# Allegro board COMPLETE SCHEMATIC V6.brd
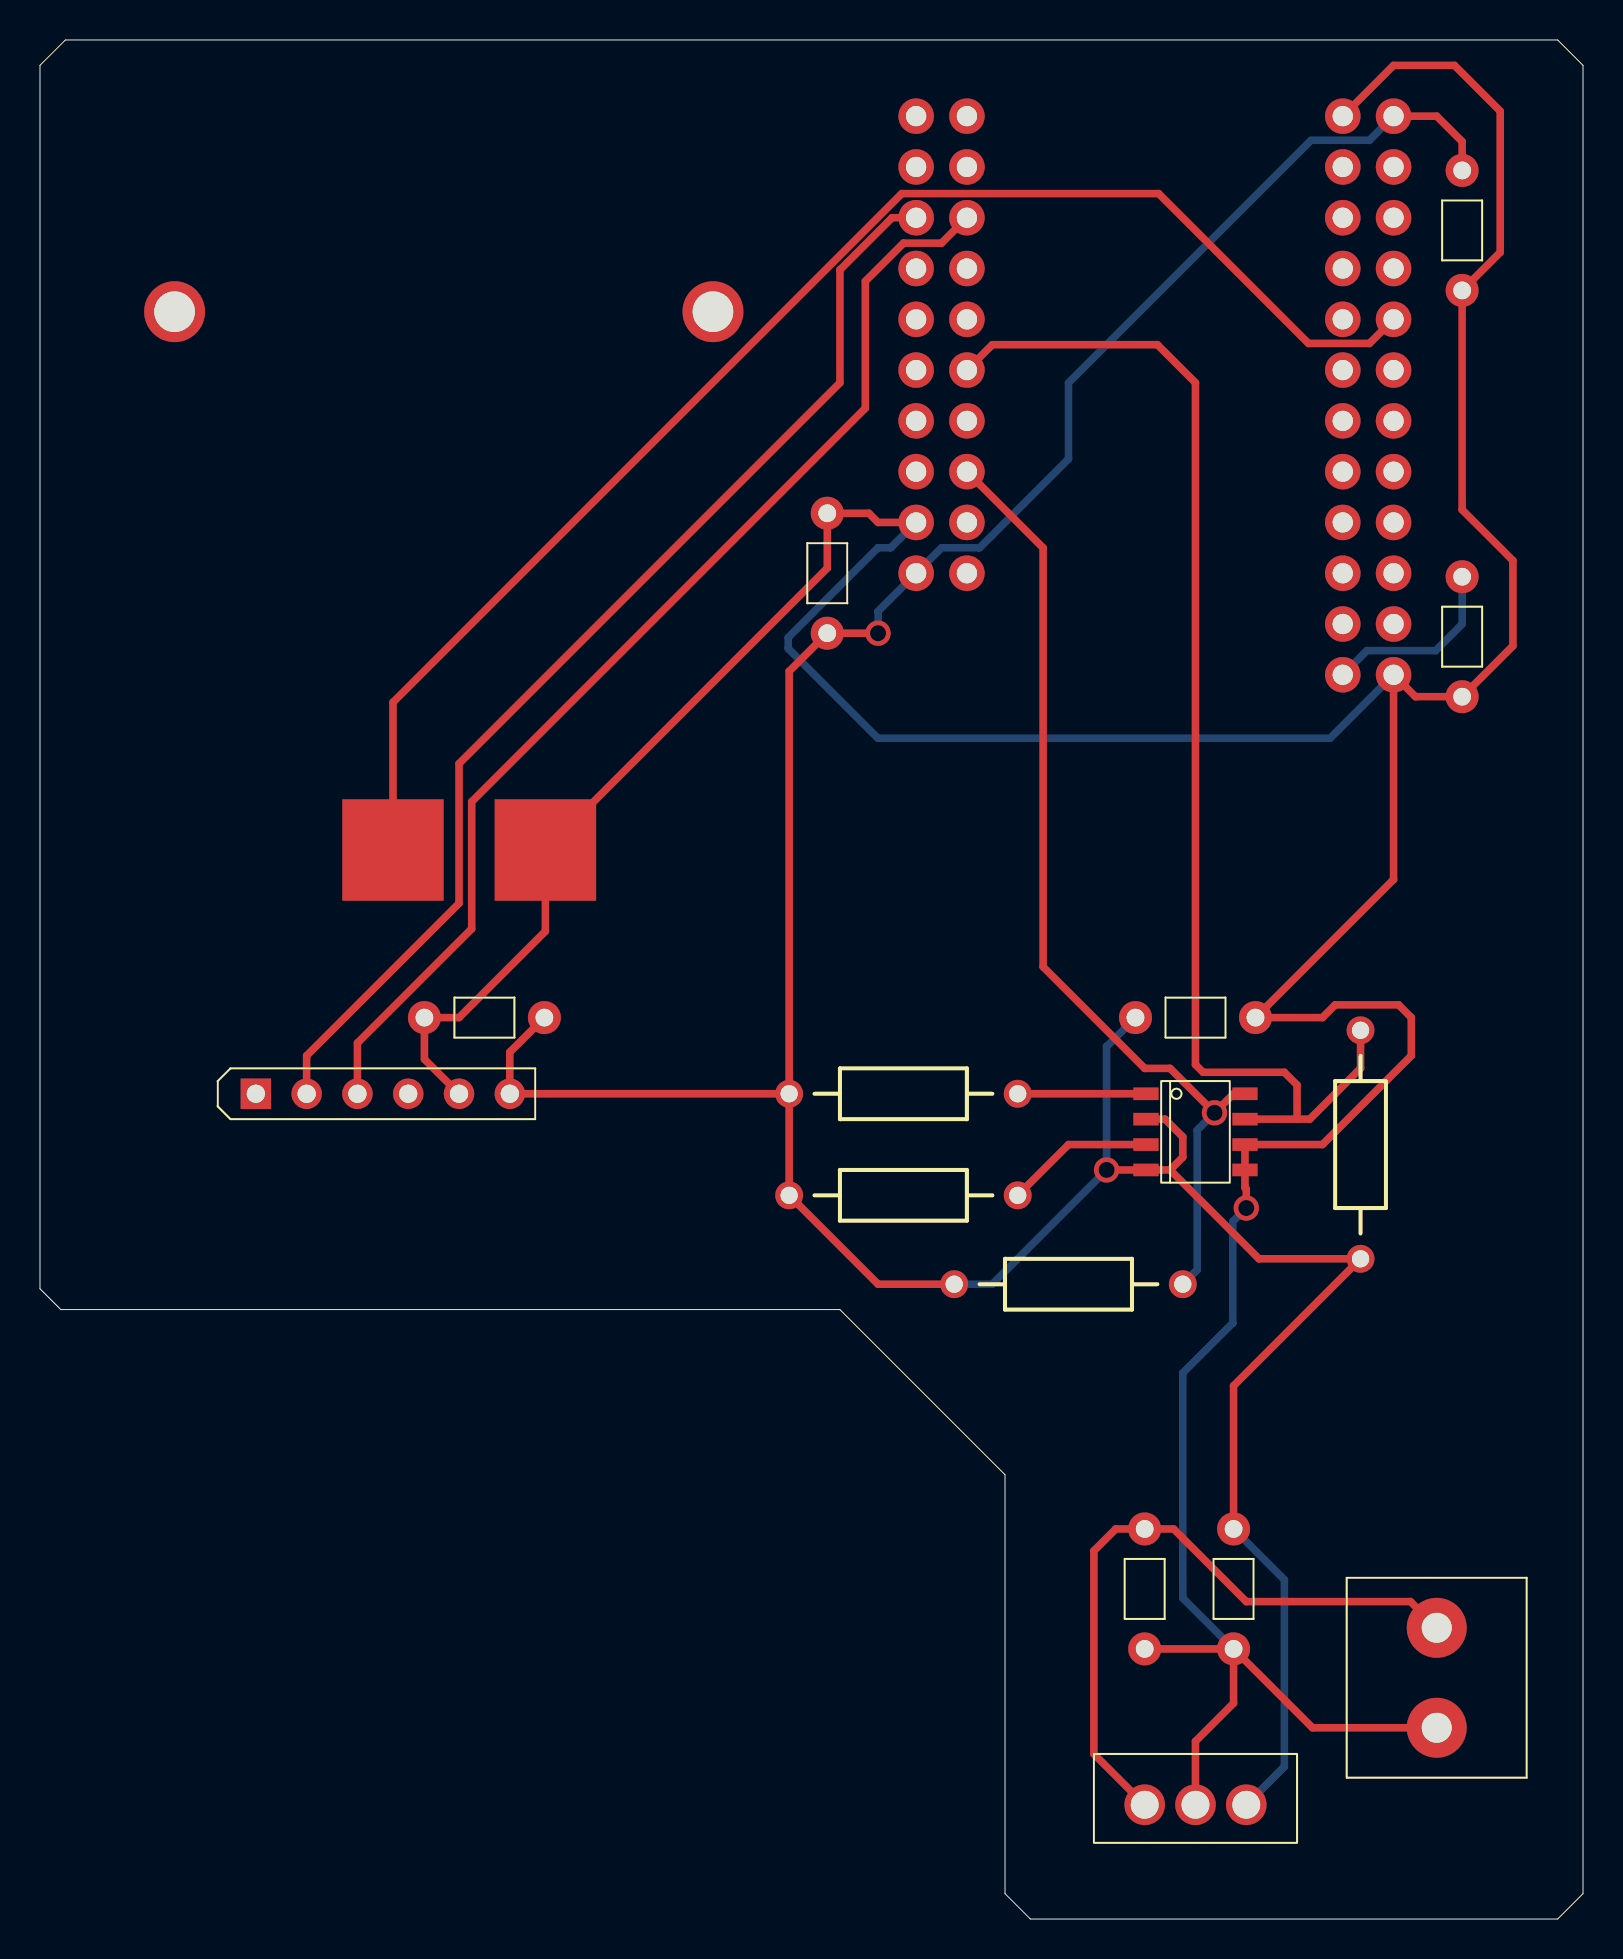
[diagram p0: board, top side]
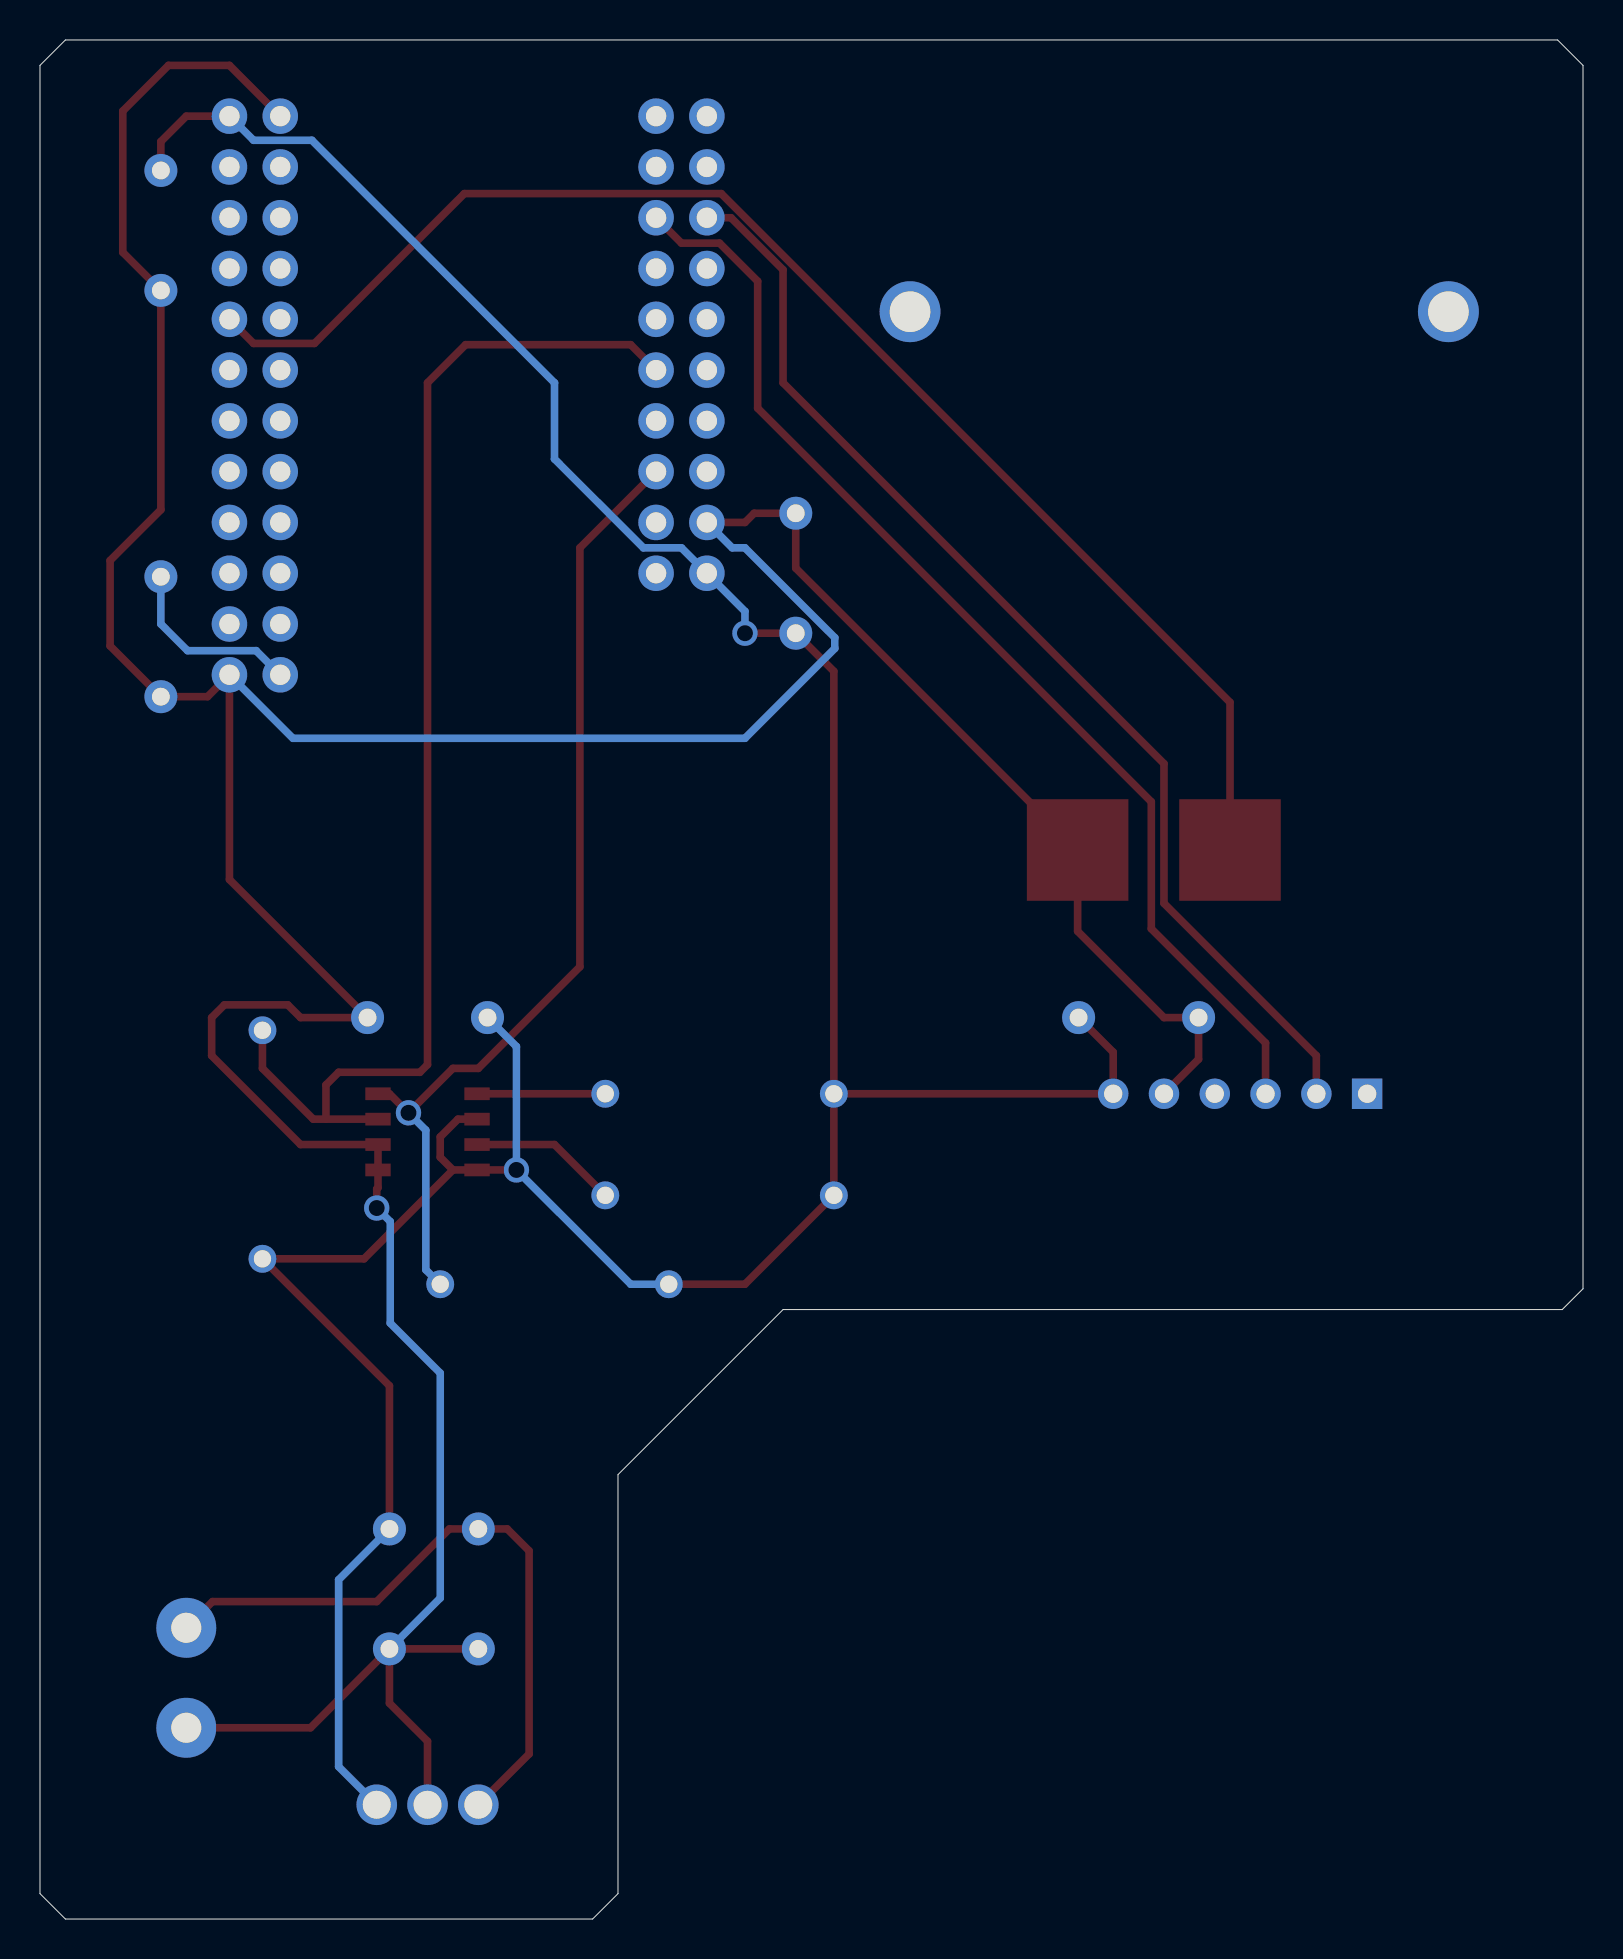
[diagram p1: board, bottom side, seen from below]

Outline 77.17 x 93.98 mm; copper layers: TOP, BOTTOM. Coordinates in mm from the lower left corner of the outline.
Outline path: 0,92.71 0,31.52 1.04,30.48 40,30.48 48.26,22.22 48.26,1.27 49.53,0 75.9,0 77.17,1.27 77.17,92.71 75.9,93.98 1.27,93.98 0,92.71

## Placement (name value [footprint] x y rotation side)
BT1  BATTERY  [2POS5MMCON]  69.85 12.06 0 top
C1  0.33uF 50V  [CAP1]  55.25 16.51 270 top
C2  0.1uF 50V  [CAP1]  59.69 16.51 270 top
C4  0.1uF 50V  [CAP1]  39.37 67.31 90 top
C5  0.1 uF 50V  [CAP1]  71.12 84.46 270 top
C6  0.1uF 50V  [CAP1]  71.12 64.13 270 top
C7  0.1uF 50V  [CAP1]  22.22 45.09 0 top
C8  CAP NP  [CAP1]  57.78 45.09 0 top
J1  HEADER 6  [SIP6]  10.79 41.28 90 top
LS1  -  [BUZZER]  36.19 91.44 0 top
R14  R  [AXRC07]  45.72 31.75 0 top
R15  R  [AXRC07]  66.04 33.02 90 top
R16  R  [AXRC07]  37.47 36.19 0 top
R17  R  [AXRC07]  37.47 41.28 0 top
U1  LM7805  [TO220AB]  55.25 5.71 180 top
U3  PSoC4BLE  [PSOC4BLE]  43.81 90.17 0 top
U5  ds3231  [SOIC8]  57.78 39.37 0 top

## Library data of the parts
BT1 = BATTERY
C1 C2 C4-C8 = CAP NP
J1 = HEADER 6_0: User Part Number: ***
LS1 = BUZZER
R14-R17 = R
U1 = Linear regulator
U3 = PSoC4BLE_0
U5 = ds3231_0: Tolerance: ***; User Part Number: ***

## Footprints (pads in the part's own frame, mm; a bottom-side part is the same pattern mirrored in y, then rotated)
2POS5MMCON
  round 3 hole 1.5: 1(0,2.5) 2(0,-2.5)
AXRC07
  round 1.397 hole 0.864: 1(0,0) 2(11.43,0)
BUZZER
  round 3.048 hole 2.032: (-29.464,-11.049) (-2.54,-11.049)
  rect 5.08x5.08 smd: 1(-18.542,-37.973) 2(-10.922,-37.973)
CAP1
  round 1.651 hole 0.889: 1(-3,0) 2(3,0)
PSOC4BLE
  round 1.778 hole 1.016: 1(2.54,-22.86) 2(0,-22.86) 3(2.54,-20.32) 4(0,-20.32) 5(2.54,-17.78) 6(0,-17.78) 7(2.54,-15.24) 8(0,-15.24) 9(2.54,-12.7) 10(0,-12.7) 11(2.54,-10.16) 12(0,-10.16) 13(2.54,-7.62) 14(0,-7.62) 15(2.54,-5.08) 16(0,-5.08) 17(2.54,-2.54) 18(0,-2.54) 19(2.54,0) 20(0,0) 21(21.336,0) 22(23.876,0) 23(21.336,-2.54) 24(23.876,-2.54) 25(21.336,-5.08) 26(23.876,-5.08) 27(21.336,-7.62) 28(23.876,-7.62) 29(21.336,-10.16) 30(23.876,-10.16) 31(21.336,-12.7) 32(23.876,-12.7) 33(21.336,-15.24) 34(23.876,-15.24) 35(21.336,-17.78) 36(23.876,-17.78) 37(21.336,-20.32) 38(23.876,-20.32) 39(21.336,-22.86) 40(23.876,-22.86) 41(21.336,-25.4) 42(23.876,-25.4) 43(21.336,-27.94) 44(23.876,-27.94)
SIP6
  rect 1.524x1.524 hole 0.914: 1(0,0)
  round 1.524 hole 0.914: 2(0,-2.54) 3(0,-5.08) 4(0,-7.62) 5(0,-10.16) 6(0,-12.7)
SOIC8
  rect 1.27x0.635 smd: 1(-2.477,1.905) 2(-2.477,0.635) 3(-2.477,-0.635) 4(-2.477,-1.905) 5(2.477,-1.905) 6(2.477,-0.635) 7(2.477,0.635) 8(2.477,1.905)
TO220AB
  round 2.032 hole 1.397: 1(0,0) 2(-2.54,0) 3(-5.08,0)

## Nets
+VBAT: BT1.1(+) C1.1 U1.1(INPUT)
GND: BT1.2(-) C1.2 C2.2 C4.2 C5.2 C6.2 C7.1 C8.2 J1.5(GND) LS1.2(B) U1.2(GEOUND) U3.4(GND1) U3.21(GND2) U3.44(GND3) U5.5(GND) U5.6(VBAT)
+5 V: C2.1 C4.1 C5.1 C7.2 C8.1 J1.6(VCC) R14.1 R15.1 R16.1 R17.1 U1.3(OUTPUT) U3.2(VDDD) U3.22(VDDA) U5.2(VCC) U5.4(R\S\T\)
RXD: J1.2(RXD) U3.16(P0.5)
SCL: R14.2 U3.5(P1.5) U5.8(SCL)
SDA: R15.2 U3.9(P1.4) U5.7(SDA)
TXD: J1.3(TXD) U3.15(P0.4)
N57082: C6.1 U3.43(VDDR)
N86841: R16.2 U5.3(I\N\T\/SQW)
N86845: R17.2 U5.1(32KHZ)
N89522: LS1.1(A) U3.30(P3.1)

Pads without a net: J1 1 4; U3 1 3 6 7 8 10 11 12 13 14 17 18 19 20 23 24 25 26 27 28 29 31 32 33 34 35 36 37 38 39 40 41 42

## Via types
v1: diameter 1.27, hole 0.8, TOP to BOTTOM, 4 vias

## Routing (per net, layer and track width the routed paths; a pad name or vN(x,y) marks a point on that pad's centre or on a via; arc(x,y) is an arc through that point)
+VBAT: length 33.4
  TOP w0.381: BT1.1 68.54,15.88 60.32,15.88 56.69,19.51 C1.1 53.8,19.51 52.7,18.41 52.7,8.25 U1.1
GND: length 225.3
  TOP w0.381: v1(60.32,35.56) 60.32,36.51 60.26,36.58 U5.5 U5.6 64.13,38.73 68.58,43.18 68.58,45.09 67.94,45.72 64.77,45.72 64.13,45.09 C8.2 67.69,51.99 U3.44 68.79,61.14 C6.2 73.66,63.68 73.66,67.94 71.12,70.48 C5.2 73.02,83.36 73.02,90.42 70.74,92.71 67.69,92.71 U3.21 ; U3.4 41.91,69.85 41.45,70.31 C4.2 39.37,67.56 LS1.2 25.27,49.4 20.95,45.09 C7.1 19.23,43 J1.5 ; U1.2 57.78,8.89 59.69,10.79 C2.2 ; C2.2 63.64,9.56 BT1.2 ; C2.2 C1.2
  BOTTOM w0.381: U3.44 64.52,59.05 41.91,59.05 37.42,63.55 37.42,64.09 41.91,68.58 42.54,68.58 U3.4 ; v1(60.32,35.56) 59.65,34.89 59.65,29.81 57.15,27.3 57.15,16.05 C2.2
+5 V: length 173.4
  TOP w0.381: U3.22 69.85,90.17 71.12,88.9 C5.1 ; R17.1 37.47,62.41 C4.1 v1(41.91,64.31) ; R17.1 R16.1 41.91,31.75 R14.1 ; R17.1 J1.6 23.5,43.36 C7.2 ; v1(53.34,37.47) U5.4 56.51,37.47 ; U5.2 56.26,40 57.15,39.12 57.15,38.1 56.51,37.47 ; 56.51,37.47 60.96,33.02 R15.1 59.69,26.67 C2.1
  BOTTOM w0.381: v1(41.91,64.31) 41.91,65.41 U3.2 45.09,68.58 46.99,68.58 51.44,73.03 51.44,76.84 63.56,88.96 66.48,88.96 U3.22 ; R14.1 47.62,31.75 v1(53.34,37.47) 53.34,43.64 C8.1 ; U1.3 62.23,7.62 62.23,16.97 C2.1
RXD: length 57.1
  TOP w0.381: U3.16 42.61,85.09 40,82.49 40,76.84 20.95,57.78 20.95,50.8 13.34,43.18 J1.2
SCL: length 49.2
  TOP w0.381: 60.32,41.28 U5.8 59.69,41.28 v1(58.74,40.32) 56.51,42.54 55.25,42.54 50.16,47.62 50.16,68.58 U3.5
  BOTTOM w0.381: R14.2 57.87,32.47 57.87,39.45 v1(58.74,40.32)
SDA: length 63.1
  TOP w0.381: R15.2 66.04,42.54 63.5,40 62.87,40 ; 62.87,40 U5.7 59.94,40 ; 62.87,40 62.87,41.71 62.23,42.35 58.17,42.35 57.78,42.73 57.78,76.84 55.88,78.74 47.62,78.74 U3.9
TXD: length 57.6
  TOP w0.381: U3.15 45.09,83.82 43.18,83.82 41.28,81.91 41.28,75.56 21.59,55.88 21.59,49.53 15.88,43.81 J1.3
N57082: length 9.4
  BOTTOM w0.381: U3.43 66.36,63.44 69.79,63.44 71.12,64.77 C6.1
N86841: length 7.5
  TOP w0.381: R16.2 51.44,38.73 U5.3
N86845: length 6.4
  TOP w0.381: R17.2 U5.1
N89522: length 71.6
  TOP w0.381: U3.30 66.48,78.8 63.44,78.8 55.94,86.3 43.1,86.3 17.65,60.85 LS1.1
